# Altium PCB PoBoI.PcbDoc (part 2 of 4)
Units mm, origin at the board's own origin, x right, y up, seen from the top; angles counter-clockwise.
Board outline 90.25 x 95.8 mm, 4 copper layers (Top Layer, GND Layer, PWR Layer, Bottom Layer), stack 1.537 mm thick; 250 components, 177 nets, 942 pads, 25 vias.
Unrouted connection lines stored in the file: 192.
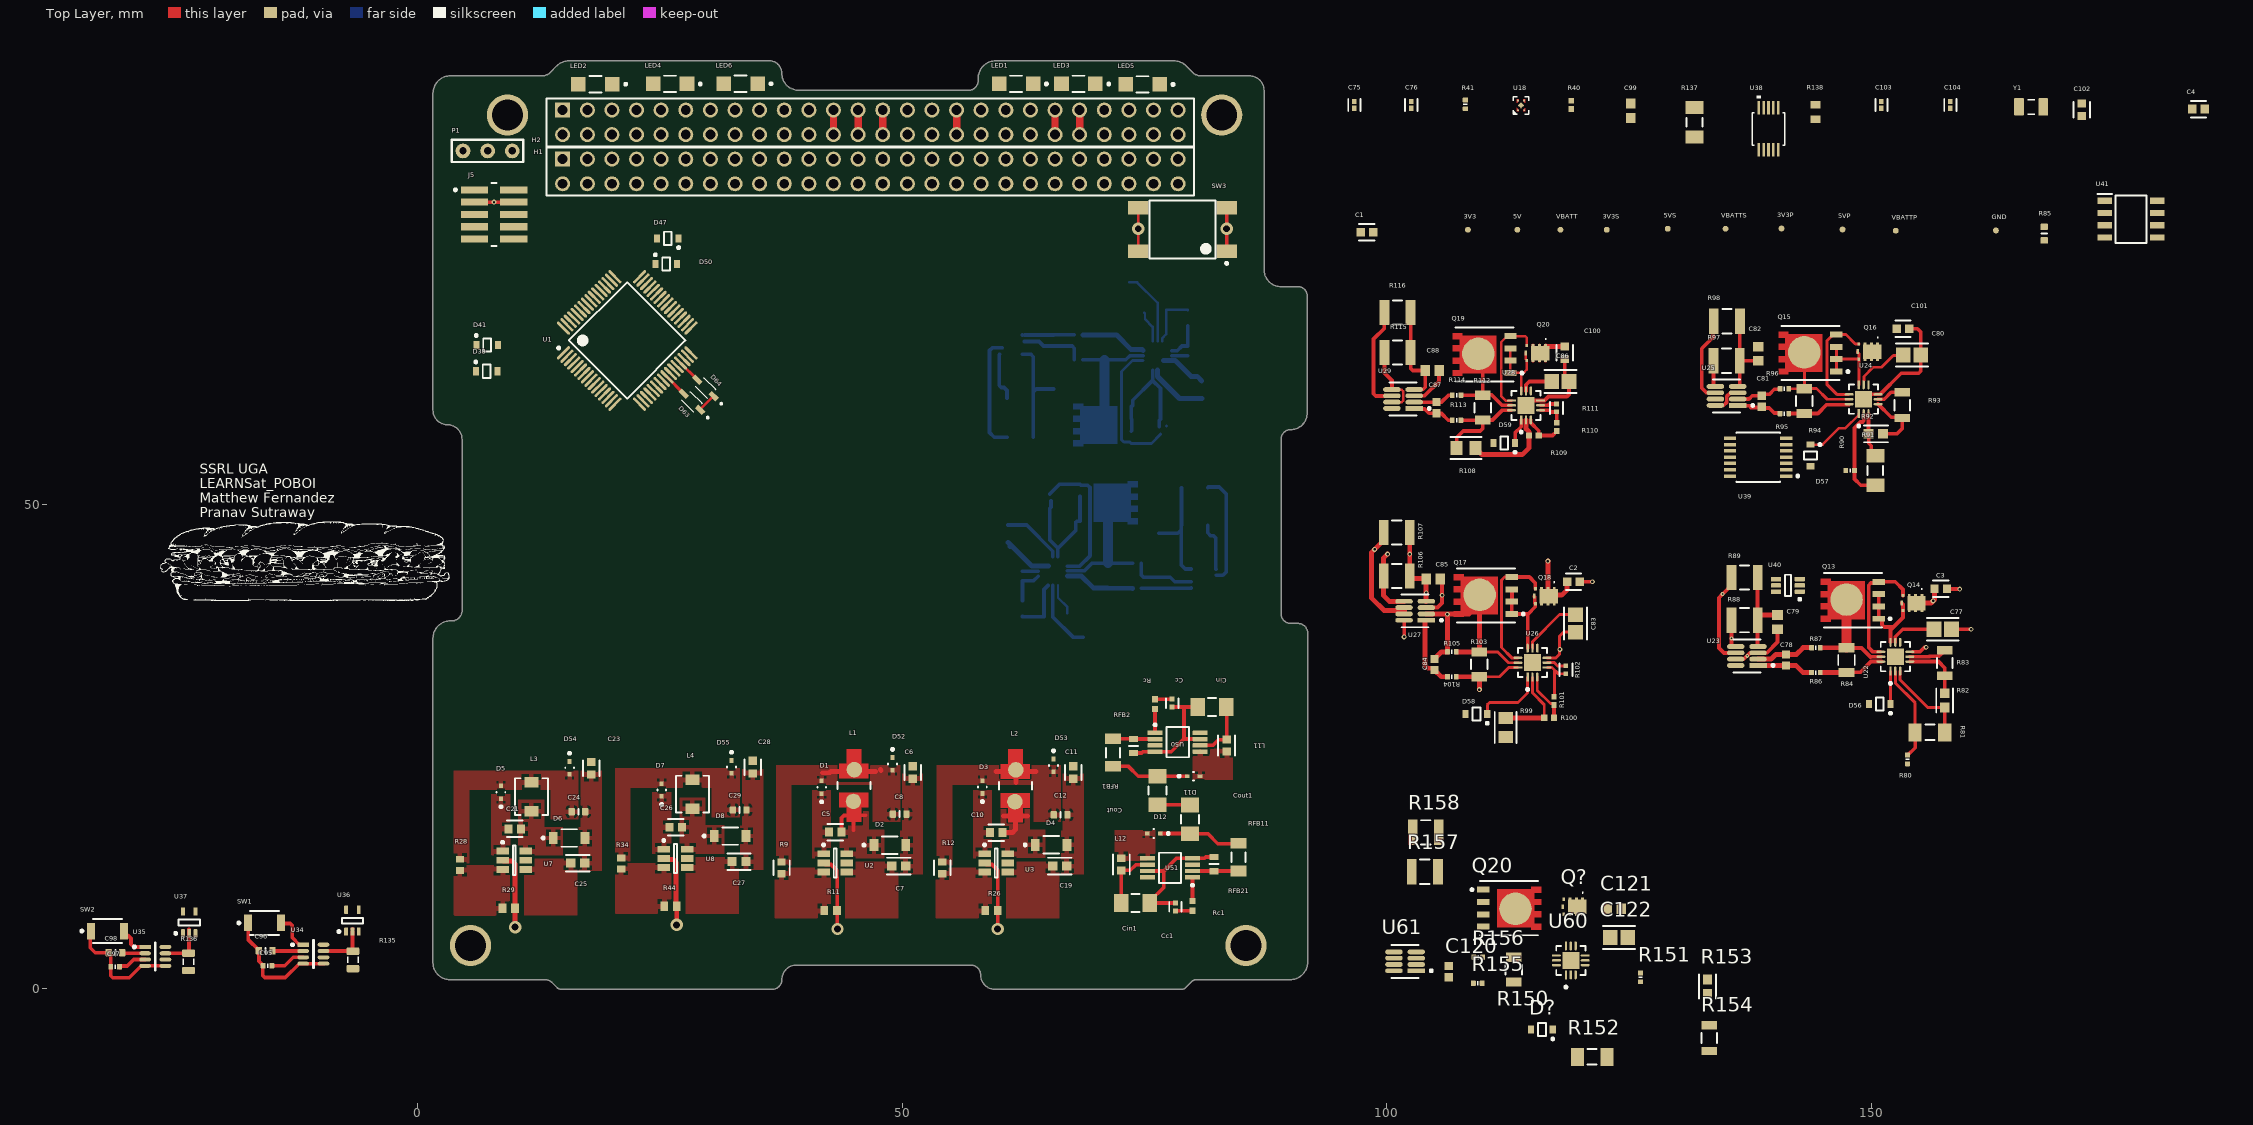
[diagram p0: Top Layer view]

## Part data (continued)
D64: library part CMP-004-00035-3, "Rectifier Diode, 1 Phase, 1 Element, 0.15A, 100V V(RRM), Silicon"
H1 H2: library part CMP-1023-00317-1, "SQ Post Socket, Through-hole, Vertical, -55 to 125 degC, 2.54 mm Pitch, 52-Pin, Female, RoHS", Manufacturer=Samtec, Temperature Range="-55 to 125 degC", ComponentLink1Description="Manufacturer URL", ComponentLink1URL=http://www.samtec.com, ComponentLink2Description=Datasheet, ComponentLink2URL=http://www.samtec.com/documents/webfiles/pdf/SSQ_TH.PDF, ComponentLink3Description="Package Specification", ComponentLink3URL=http://www.samtec.com/documents/webfiles/cpdf/SSQ-1XX-XX-XXX-X-XX-XXX-XX-X-MKT.pdf, DatasheetVersion=F-214, Mounting Technology=Through-hole, Orientation=Vertical, PackageDescription="Assembly, Socket Strip .025[0.64] SQ Tail", PackageReference=SSQ-126-22-X-D, PackageVersion="BD, 6/1987", PartNumber=SSQ-126-22-G-D, Pitch="2.54 mm", RoHS=True
J5: library part CMP-002-00076-1, "Board Connector, 10 Contact(s), 2 Row(s), Male, Straight, 0.05 inch Pitch, Surface Mount Terminal, Locking", Connector Type="BOARD CONNECTOR", Mounting Technology=Board, RoHS Compliant=Yes
L1 L2: library part CMP-06042-015693-1, "Wire Wound Ferrite Inductor for General Circuits 15μH ±10% 0.73Ω 360mA 1812", Case Code (Imperial)=1812, Case Code (Metric)=4532, Current Rating=360mA, DC Resistance (DCR)=730mR, Frequency=19MHz, Max Operating Temperature=85°C, Min Operating Temperature=-40°C, Package Quantity=500, Resistor Type=Wirewound, Test Frequency=1MHz, Tolerance=10%, Case/Package=1812, Core Material=Ferrite, DC Current=360mA, Depth=3.4mm, Height=2.6mm, Height - Seated (Max)=0.11inch, Inductance=15uH, Lead Free="Lead Free", Length=4.5mm, Max DC Current=360mA, Military Standard=Not, Mount="Surface Mount", Packaging="Tape and Reel", Q Factor=35, Radiation Hardening=No, Self Resonant Frequency=19MHz, Series=LQH43M, Series Resistance=730mR, Shielding=Unshielded, Termination=SMD/SMT, Weight=0.004586oz, Width=3.2mm
L3 L4: library part CMP-006-00022-2, "Inductor Power Molded Wirewound 10uH 20% 100KHz 1.2A 0.522Ohm DCR Automotive T/R", DC Resistance MAX="522 mOhms", DC Resistance Typical="435 mOhms", Inductance=10uH, Rated Current=1.20A, Saturation Current=1.6A
L11 L12: library part CMP-08253-000012-2, "Shielded Multilayer Inductor 10uH ±20% 250mA 1365mΩ SMD 0603", Case Code (Imperial)=0603, Case Code (Metric)=1608, Current Rating=250mA, DC Resistance (DCR)=1.365R, Max Operating Temperature=125°C, Min Operating Temperature=-55°C, Package Quantity=4000, Resistance=1.05R, Saturation Current=90mA, Self Resonant Frequency=50MHz, Test Frequency=2MHz, Tolerance=20%, Case/Package=0603, Core Material=Ferrite, Height - Seated (Max)=0.037inch, Inductance=10uH, Length=0.063inch, Mount="Surface Mount", Packaging="Tape and Reel", RoHS Compliant=Yes, Shielding=Shielded, Width=0.031inch
LED1 LED2 LED3 LED4 LED5 LED6: library part CMP-21615-000001-1, "LED RED DIFFUSED CHIP SMD", Case Code (Imperial)=1206, Case Code (Metric)=3216, Color=Red, Forward Current=20mA, Forward Voltage=2.1V, Lens Color=White, Max Operating Temperature=85°C, Min Operating Temperature=-40°C, Package Quantity=1, Power Dissipation=65mW, Reverse Voltage=5V, Case/Package=1206, Depth=1.6mm, Dominant Wavelength=626nm, Height=1.1mm, Illumination Color=Red, Lead Free="Lead Free", Length=3.2mm, Lens Style=Rectangular, Lens Transparency=Diffused, Luminous Intensity=10mcd, Mount="Surface Mount", Number of Elements=1, Number of LEDs=1, Number of Pins=2, Packaging="Tape and Reel", Power Rating=65mW, Radiation Hardening=No, REACH SVHC="No SVHC", Test Current=20mA, Viewing Angle=170°, Wavelength=626nm, Width=1.6mm
P1: library part CMP-002-00073-2, "KK 254 Breakaway Header, Vertical, 3 Circuits, 0.76µm Gold (Au) Selective Plating, Mating Pin Length 6.09mm", Max Operating Temperature=75°C, Min Operating Temperature=0°C, Voltage Rating=250V, Gender=Male, Mounting Technology="Through Hole", Pins=3
Q13 Q15 Q17 Q19 Q20 Q21 Q23: library part CMP-013-00040-1, "Power Field-Effect Transistor, 23.5A I(D), 60V, 0.00625ohm, 1-Element, N-Channel, Silicon, Metal-oxide Semiconductor FET", Max Operating Temperature=150°C, Pins=5, RoHS Compliant=Yes
Q14 Q16 Q18 Q20 Q22 Q24 Q?: library part CMP-013-00041-1, "Power Field-Effect Transistor, 11.6A I(D), 30V, 0.0145ohm, 1-Element, N-Channel, Silicon, Metal-oxide Semiconductor FET", Max Operating Temperature=150°C, Pins=3, RoHS Compliant=Yes
R9 R12: library part CMP-2000-03264-2, "RES Thick Film, 35.7kΩ, 1%, 0.1W, 100ppm/°C, 0603", Case Code (Imperial)=0603, Case Code (Metric)=1608, Max Operating Temperature=155°C, Max Power Dissipation=100mW, Min Operating Temperature=-55°C, Package Quantity=10, Resistance=35.7kR, Temperature Coefficient=100ppm/°C, Tolerance=1%, Voltage Rating=75V, Case/Package=0603, Composition="Thick Film", Contact Plating=Tin, Depth=0.85mm, Features="Automotive AEC-Q200", Height=0.45mm, Length=1.55mm, Military Standard=Not, Number of Pins=2, Number of Terminations=2, Packaging="Tape and Reel", Power Rating=100mW, Radiation Hardening=No, Termination=Solder, Weight=7.1E-05oz, Width=0.033inch
R11 R26 R29 R44: library part CMP-1666-00005-4, "Chip Resistor, 10 KOhm, +/- 1%, 100 mW, -55 to 155 degC, 0603 (1608 Metric), RoHS, Tape and Reel / CRCW060310K0FKEA", Manufacturer="Vishay Semiconductor", Max Operating Temperature="155 degC", Min Operating Temperature="-55 degC", Package Quantity=5000, Voltage Rating="75 V", ComponentLink1Description="Manufacturer URL", ComponentLink1URL=http://www.vishay.com/, ComponentLink2Description=Datasheet, ComponentLink2URL=https://datasheet.ciiva.com/11809/0900766b80d98afc-11809037.pdf, DatasheetVersion=06/2012, Height="0.45 mm", Length="1.55 mm", Mounting Technology="Surface Mount", PackageDescription="2-Pin Surface Mount Device, Body 1.575 x 0.85 mm", PackageReference=0603, Packaging="Tape and Reel", REACH SVHC=Unknown, RoHSCompliant=true
R28 R34: library part CMP-2000-03094-1, Manufacturer="Vishay Dale", Part Number=CRCW060322K1FKEA
R40: library part CMP-2002-07452-1, Manufacturer="Yageo / Phycomp", Part Number=RC0402FR-071K1L
R41: library part CMP-009-00099-2, "3K 0.063W 1% 0402 (1005 Metric)  SMD", Case/Package=0402, Power=63mW, Tolerance=1%, Mounting Technology=SMT, Pins=2
R80 R90 R151: library part CMP-009-00110-2, "768K 0.063W 1% 0402 (1005 Metric)  SMD", Case/Package=0402, Power=63mW, Tolerance=1%, Mounting Technology=SMT, Pins=2